# Altium PCB ETL_RB_Mockup.PcbDoc
Units mm, origin at the board's own origin, x right, y up, seen from the top; angles counter-clockwise.
Board outline 304.7 x 56.5 mm, 2 copper layers (Top Layer, Bottom Layer), stack 0.761 mm thick; 28 components, 0 nets, 1176 pads, 57 vias.
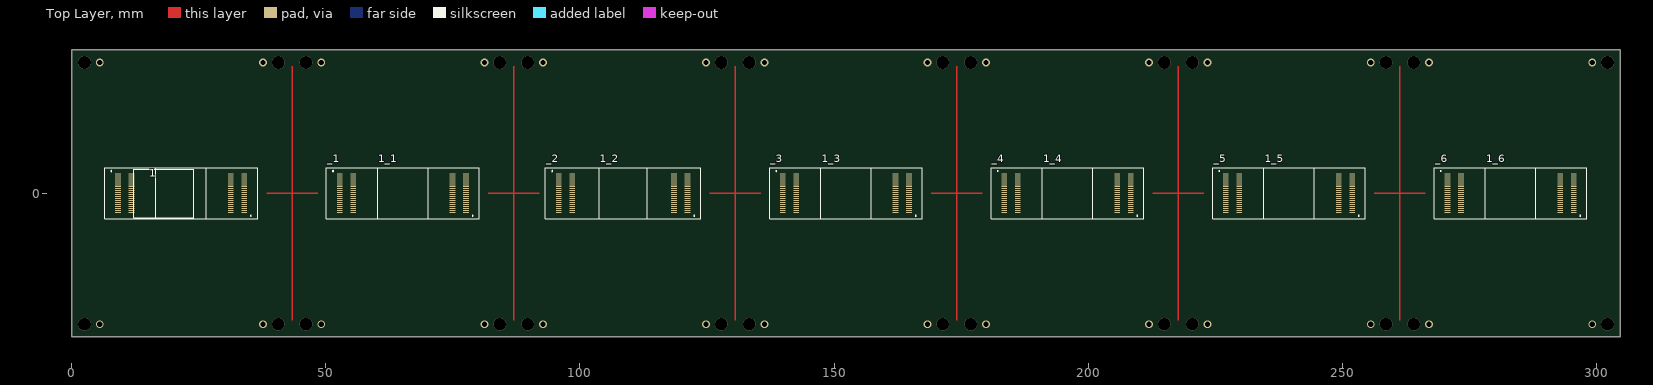
[diagram p0: Top Layer view]
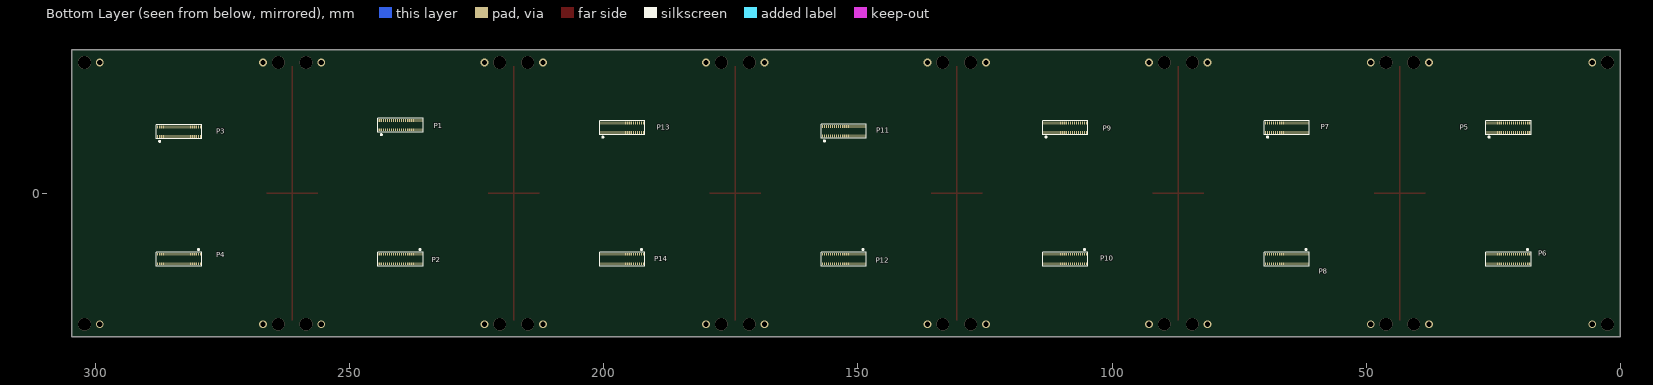
[diagram p1: Bottom Layer view, seen from below]

## Layer stack, top to bottom
Top Solder: solder mask 0.0178, Solder Resist, Dk 4.1
Top Layer: signal copper 0.0175
Dielectric 1: prepreg 0.0691, 1080, Dk 3.4
Dielectric 2: core 0.1016, TU-863, Dk 3.7
Dielectric 3: prepreg 0.1417, 1080, Dk 3.4
Dielectric 4: core 0.1016, TU-863, Dk 3.7
Dielectric 5: prepreg 0.1417, 1080, Dk 3.4
Dielectric 6: core 0.1016, TU-863, Dk 3.7
Dielectric 7: prepreg 0.0691, 1080, Dk 3.4
Bottom Layer: signal copper 0.0175
Bottom Solder: solder mask 0.0178, Solder Resist, Dk 4.1

## Board outline
0,-28.25 0,28.25 81.95,28.25 304.7,28.25 304.7,-28.25 91.95,-28.25 48.35,-28.25 38.35,-28.25

## Design rules (kind name [scope] priority, off if disabled: settings)
Clearance [All] p1: gap=0.076 ignorepadtopadclearanceinfootprint=FALSE except(0: Arc-Hole Track-Hole SMDPad-Hole THPad-Hole Via-Hole Fill-Hole Poly-Hole Region-Hole Text-Hole)
Height [All] p1 off: minheight=0 maxheight=25.4 prefheight=12.7
HoleToHoleClearance HoleToHoleClearance_1 [InNet('GND') or InNet('LV_RB') or InNet('1V5A') or InNet('1V5D') or InNet('1V2A') or InNet('1V2B') or InNet('1V2C') or InNet('1V2D') vs InNet('GND') or InNet('LV_RB') or InNet('1V5A') or InNet('1V5D') or InNet('1V2A') or InNet('1V2B') or InNet('1V2C') or InNet('1V2D')] p1: gap=0.15 allowstackedmicrovias=TRUE
HoleToHoleClearance [All] p2: gap=0.254 allowstackedmicrovias=TRUE
MinimumSolderMaskSliver [All] p1: minsoldermaskwidth=0.102
PlaneClearance PlaneClearance_1 [InNetClass('BV')] p1: clearance=0.508
PlaneClearance [All] p2: clearance=0.152
PlaneConnect PlaneConnect_1 [All] p1: planeconnectstyle=Direct reliefexpansion=0.508 reliefentries=4 reliefconductorwidth=0.254 reliefairgap=0.254
PolygonConnect [All] p1: connectstyle=Relief reliefconductorwidth=0.254 reliefentries=4 polygonreliefangle="90 Angle" airgapwidth=0.254
RoutingVias [All] p1: holewidth=0.25 width=0.4 viastyle="Through Hole" minholewidth=0.15 minwidth=0.25 maxholewidth=0.711 maxwidth=1.27
SilkToSilkClearance [All] p1: silktosilkclearance=0.025
SilkToSolderMaskClearance [IsPad] p1: minsilkscreentomaskgap=0.025 clearancetoexposedcopper=TRUE
SolderMaskExpansion SolderMaskExpansion_1 [InPadClass('WP7B40PAD')] p1: expansion=0.038 istentingtop=FALSE
SolderMaskExpansion [All] p2: expansion=0.051 istentingtop=FALSE
Width Width_HS [InNetClass('HS')] p1: maxlimit=0.13 minlimit=0.076 preferedwidth=0.12 bottomlayer_minwidth=0.12 bottomlayer_maxwidth=0.12 minimp=50.000000 maximp=50.000000 favimp=50.000000 // impedance controlled signals
Width [All] p2: maxlimit=2.54 minlimit=0.076 preferedwidth=0.12 toplayer_minwidth=0.076 minimp=50.000000 maximp=50.000000 favimp=50.000000
23 further rules are at their usual default settings.

## Classes and differential pairs
pad class WP7B40PAD: P5-1 P5-2 P5-3 P5-4 P5-5 P5-6 P5-7 P5-8 P5-9 P5-10 P5-11 P5-12 P5-13 P5-14 P5-15 P5-16 P5-17 P5-18 P5-19 P5-20 P5-21 P5-22 P5-23 P5-24 P5-25 P5-26 P5-27 P5-28 P5-29 P5-30 P5-31 P5-32 P5-33 P5-34 P5-35 P5-36 P5-37 P5-38 P5-39 P5-40 P5-41 P5-42 P5-43 P5-44 P6-1 P6-2 P6-3 P6-4 P6-5 P6-6 P6-7 P6-8 P6-9 P6-10 P6-11 P6-12 P6-13 P6-14 P6-15 P6-16 P6-17 P6-18 P6-19 P6-20 P6-21 P6-22 P6-23 P6-24 P6-25 P6-26 P6-27 P6-28 P6-29 P6-30 P6-31 P6-32 P6-33 P6-34 P6-35 P6-36 P6-37 P6-38 P6-39 P6-40 P6-41 P6-42 P6-43 P6-44 P7-1 P7-2 P7-3 P7-4 P7-5 P7-6 P7-7 P7-8 P7-9 P7-10 P7-11 P7-12 P7-13 P7-14 P7-15 P7-16 P7-17 P7-18 P7-19 P7-20 P7-21 P7-22 P7-23 P7-24 P7-25 P7-26 P7-27 P7-28 P7-29 P7-30 P7-31 P7-32 P7-33 P7-34 P7-35 P7-36 P7-37 P7-38 P7-39 P7-40 P7-41 P7-42 P7-43 P7-44 P8-1 P8-2 P8-3 P8-4 P8-5 P8-6 P8-7 P8-8 P8-9 P8-10 P8-11 P8-12 P8-13 P8-14 P8-15 P8-16 P8-17 P8-18 P8-19 P8-20 P8-21 P8-22 P8-23 P8-24 P8-25 P8-26 P8-27 P8-28 P8-29 P8-30 P8-31 P8-32 P8-33 P8-34 P8-35 P8-36 P8-37 P8-38 P8-39 P8-40 P8-41 P8-42 P8-43 P8-44 P9-1 P9-2 P9-3 P9-4 P9-5 P9-6 P9-7 P9-8 P9-9 P9-10 P9-11 P9-12 P9-13 P9-14 P9-15 P9-16 P9-17 P9-18 P9-19 P9-20 P9-21 P9-22 P9-23 P9-24 P9-25 P9-26 P9-27 P9-28 P9-29 P9-30 P9-31 P9-32 P9-33 P9-34 P9-35 P9-36 P9-37 P9-38 P9-39 P9-40 P9-41 P9-42 P9-43 P9-44 P10-1 P10-2 P10-3 P10-4 P10-5 P10-6 P10-7 P10-8 P10-9 P10-10 P10-11 P10-12 P10-13 P10-14 P10-15 P10-16 P10-17 P10-18 P10-19 P10-20 P10-21 P10-22 P10-23 P10-24 P10-25 P10-26 P10-27 P10-28 P10-29 P10-30 P10-31 P10-32 P10-33 P10-34 P10-35 P10-36 P10-37 P10-38 P10-39 P10-40 P10-41 P10-42 P10-43 P10-44
component class ETL_RB: P5 P6 P7 P8 P9 P10

## Components (designator, comment, footprint, x,y, rotation, side; value= is the part's Value field where it differs from the comment)
1 "DF40C-40DS-0.4V" vtrx+ 33.96,-3.8 r90 top
1_1 "DF40C-40DS-0.4V" vtrx+ 77.56,-3.8 r90 top
1_2 "DF40C-40DS-0.4V" vtrx+ 121.16,-3.8 r90 top
1_3 "DF40C-40DS-0.4V" vtrx+ 164.76,-3.8 r90 top
1_4 "DF40C-40DS-0.4V" vtrx+ 208.36,-3.8 r90 top
1_5 "DF40C-40DS-0.4V" vtrx+ 251.96,-3.8 r90 top
1_6 "DF40C-40DS-0.4V" vtrx+ 295.56,-3.8 r90 top
_1 "DF40C-40DS-0.4V" vtrx+ 52.7,3.8 r270 top
_2 "DF40C-40DS-0.4V" vtrx+ 95.8,3.8 r270 top
_3 "DF40C-40DS-0.4V" vtrx+ 139.9,3.8 r270 top
_4 "DF40C-40DS-0.4V" vtrx+ 183.5,3.8 r270 top
_5 "DF40C-40DS-0.4V" vtrx+ 227.1,3.8 r270 top
_6 "DF40C-40DS-0.4V" vtrx+ 270.7,3.8 r270 top
P1 "WP7B-P040VA1" wp7b-40p 243.8,12.5 r180 bottom
P2 "WP7B-P040VA1" wp7b-40p 236.2,-12 r0 bottom
P3 "WP7B-P040VA1" wp7b-40p 287.4,11.2 r180 bottom
P4 "WP7B-P040VA1" wp7b-40p 279.8,-12 r0 bottom
P5 "WP7B-P040VA1" WP7B-40P 25.8,12 r180 bottom locked
P6 "WP7B-P040VA1" WP7B-40P 18.2,-12 r0 bottom locked
P7 "WP7B-P040VA1" WP7B-40P 69.4,12 r180 bottom locked
P8 "WP7B-P040VA1" WP7B-40P 61.8,-12 r0 bottom locked
P9 "WP7B-P040VA1" WP7B-40P 113,12 r180 bottom locked
P10 "WP7B-P040VA1" WP7B-40P 105.4,-12 r0 bottom locked
P11 "WP7B-P040VA1" wp7b-40p 156.6,11.285 r180 bottom
P12 "WP7B-P040VA1" wp7b-40p 149,-12 r0 bottom
P13 "WP7B-P040VA1" wp7b-40p 200.2,12 r180 bottom
P14 "WP7B-P040VA1" wp7b-40p 192.6,-12 r0 bottom
? "DF40C-40DS-0.4V" vtrx+ 9.1,3.8 r270 top

## Footprints (in the part's own frame and the unit in brackets; to place one, negate y for a bottom-side part, rotate by r counter-clockwise, add the part's x,y. Pads: shape width x height; smd on the part's side, far side on the other; paste and mask are expansions set on the pad)
vtrx+ [mm]
  rect 0.2x1.12 smd: 1(0,0) 2(0,2.66) 3(0.4,0) 4(0.4,2.66) 5(0.8,0) 6(0.8,2.66) 7(1.2,0) 8(1.2,2.66) 9(1.6,0) 10(1.6,2.66) 11(2,0) 12(2,2.66) 13(2.4,0) 14(2.4,2.66) 15(2.8,0) 16(2.8,2.66) 17(3.2,0) 18(3.2,2.66) 19(3.6,0) 20(3.6,2.66) 21(4,0) 22(4,2.66) 23(4.4,0) 24(4.4,2.66) 25(4.8,0) 26(4.8,2.66) 27(5.2,0) 28(5.2,2.66) 29(5.6,0) 30(5.6,2.66) 31(6,0) 32(6,2.66) 33(6.4,0) 34(6.4,2.66) 35(6.8,0) 36(6.8,2.66) 37(7.2,0) 38(7.2,2.66) 39(7.6,0) 40(7.6,2.66)
  silkscreen extent -1.2,-2.6 8.8,17.4, body extent -1.2,-2.6 8.8,17.4, height 2
wp7b-40p [mm]
  rect 0.22x0.55 smd: 1(0,0) 2(0.4,0) 3(0.8,0) 4(1.2,0) 5(1.6,0) 6(2,0) 7(2.4,0) 8(2.8,0) 9(3.2,0) 10(3.6,0) 11(4,0) 12(4.4,0) 13(4.8,0) 14(5.2,0) 15(5.6,0) 16(6,0) 17(6.4,0) 18(6.8,0) 19(7.2,0) 20(7.6,0) 21(7.6,1.85) 22(7.2,1.85) 23(6.8,1.85) 24(6.4,1.85) 25(6,1.85) 26(5.6,1.85) 27(5.2,1.85) 28(4.8,1.85) 29(4.4,1.85) 30(4,1.85) 31(3.6,1.85) 32(3.2,1.85) 33(2.8,1.85) 34(2.4,1.85) 35(2,1.85) 36(1.6,1.85) 37(1.2,1.85) 38(0.8,1.85) 39(0.4,1.85) 40(0,1.85) 41(-0.4,0) 42(8,0) 43(8,1.85) 44(-0.4,1.85)
  silkscreen extent -0.65,-1 8.25,2.3, body extent -1.5,-0.32 9.1,2.17, height 0.5
WP7B-40P [mm]
  rect 0.22x0.55 smd: 1(0,0) 2(0.4,0) 3(0.8,0) 4(1.2,0) 5(1.6,0) 6(2,0) 7(2.4,0) 8(2.8,0) 9(3.2,0) 10(3.6,0) 11(4,0) 12(4.4,0) 13(4.8,0) 14(5.2,0) 15(5.6,0) 16(6,0) 17(6.4,0) 18(6.8,0) 19(7.2,0) 20(7.6,0) 21(7.6,1.85) 22(7.2,1.85) 23(6.8,1.85) 24(6.4,1.85) 25(6,1.85) 26(5.6,1.85) 27(5.2,1.85) 28(4.8,1.85) 29(4.4,1.85) 30(4,1.85) 31(3.6,1.85) 32(3.2,1.85) 33(2.8,1.85) 34(2.4,1.85) 35(2,1.85) 36(1.6,1.85) 37(1.2,1.85) 38(0.8,1.85) 39(0.4,1.85) 40(0,1.85) 41(-0.4,0) 42(8,0) 43(8,1.85) 44(-0.4,1.85)
  silkscreen extent -0.65,-1 8.25,2.3, body extent -1.5,-0.32 9.1,2.17, height 0.5

## Part data
1 1_1 1_2 1_3 1_4 1_5 1_6 _1 _2 _3 _4 _5 _6 ?: library part VTRX+_DF40C-2.0-40DS-0.4V, "VTRX+ module with 2.5mm stack Height.", Parameter 1=VTRX+
P1 P2 P3 P4 P5 P6 P7 P8 P9 P10 P11 P12 P13 P14: library part WP7B-40P, "plug"

## Via types
v1: diameter 1.524, hole 1.016, Top Layer to Bottom Layer, 29 vias
v2: diameter 2.5, hole 2.5, Top Layer to Bottom Layer, 28 vias

## Nets (pads, with @x,y where several pads share a name; then routed paths per layer and width w, separated by ;. In a path a pad name is that pad's centre, name@x,y a point inside that pad or via, vN(x,y) a via of type N, cw(c..) or ccw(c..) an arc to the next point about the centre after c; other vN are vias at no path point)
pads on no net: 1.1 1.2 1.3 1.4 1.5 1.6 1.7 1.8 1.9 1.10 1.11 1.12 1.13 1.14 1.15 1.16 1.17 1.18 1.19 1.20 1.21 1.22 1.23 1.24 1.25 1.26 1.27 1.28 1.29 1.30 1.31 1.32 1.33 1.34 1.35 1.36 1.37 1.38 1.39 1.40 1_1.1 1_1.2 1_1.3 1_1.4 1_1.5 1_1.6 1_1.7 1_1.8 1_1.9 1_1.10 1_1.11 1_1.12 1_1.13 1_1.14 1_1.15 1_1.16 1_1.17 1_1.18 1_1.19 1_1.20 1_1.21 1_1.22 1_1.23 1_1.24 1_1.25 1_1.26 1_1.27 1_1.28 1_1.29 1_1.30 1_1.31 1_1.32 1_1.33 1_1.34 1_1.35 1_1.36 1_1.37 1_1.38 1_1.39 1_1.40 1_2.1 1_2.2 1_2.3 1_2.4 1_2.5 1_2.6 1_2.7 1_2.8 1_2.9 1_2.10 1_2.11 1_2.12 1_2.13 1_2.14 1_2.15 1_2.16 1_2.17 1_2.18 1_2.19 1_2.20 1_2.21 1_2.22 1_2.23 1_2.24 1_2.25 1_2.26 1_2.27 1_2.28 1_2.29 1_2.30 1_2.31 1_2.32 1_2.33 1_2.34 1_2.35 1_2.36 1_2.37 1_2.38 1_2.39 1_2.40 1_3.1 1_3.2 1_3.3 1_3.4 1_3.5 1_3.6 1_3.7 1_3.8 1_3.9 1_3.10 1_3.11 1_3.12 1_3.13 1_3.14 1_3.15 1_3.16 1_3.17 1_3.18 1_3.19 1_3.20 1_3.21 1_3.22 1_3.23 1_3.24 1_3.25 1_3.26 1_3.27 1_3.28 1_3.29 1_3.30 1_3.31 1_3.32 1_3.33 1_3.34 1_3.35 1_3.36 1_3.37 1_3.38 1_3.39 1_3.40 1_4.1 1_4.2 1_4.3 1_4.4 1_4.5 1_4.6 1_4.7 1_4.8 1_4.9 1_4.10 1_4.11 1_4.12 1_4.13 1_4.14 1_4.15 1_4.16 1_4.17 1_4.18 1_4.19 1_4.20 1_4.21 1_4.22 1_4.23 1_4.24 1_4.25 1_4.26 1_4.27 1_4.28 1_4.29 1_4.30 1_4.31 1_4.32 1_4.33 1_4.34 1_4.35 1_4.36 1_4.37 1_4.38 1_4.39 1_4.40 1_5.1 1_5.2 1_5.3 1_5.4 1_5.5 1_5.6 1_5.7 1_5.8 1_5.9 1_5.10 1_5.11 1_5.12 1_5.13 1_5.14 1_5.15 1_5.16 1_5.17 1_5.18 1_5.19 1_5.20 1_5.21 1_5.22 1_5.23 1_5.24 1_5.25 1_5.26 1_5.27 1_5.28 1_5.29 1_5.30 1_5.31 1_5.32 1_5.33 1_5.34 1_5.35 1_5.36 1_5.37 1_5.38 1_5.39 1_5.40 1_6.1 1_6.2 1_6.3 1_6.4 1_6.5 1_6.6 1_6.7 1_6.8 1_6.9 1_6.10 1_6.11 1_6.12 1_6.13 1_6.14 1_6.15 1_6.16 1_6.17 1_6.18 1_6.19 1_6.20 1_6.21 1_6.22 1_6.23 1_6.24 1_6.25 1_6.26 1_6.27 1_6.28 1_6.29 1_6.30 1_6.31 1_6.32 1_6.33 1_6.34 1_6.35 1_6.36 1_6.37 1_6.38 1_6.39 1_6.40 ?.1 ?.2 ?.3 ?.4 ?.5 ?.6 ?.7 ?.8 ?.9 ?.10 ?.11 ?.12 ?.13 ?.14 ?.15 ?.16 ?.17 ?.18 ?.19 ?.20 ?.21 ?.22 ?.23 ?.24 ?.25 ?.26 ?.27 ?.28 ?.29 ?.30 ?.31 ?.32 ?.33 ?.34 ?.35 ?.36 ?.37 ?.38 ?.39 ?.40 _1.1 _1.2 _1.3 _1.4 _1.5 _1.6 _1.7 _1.8 _1.9 _1.10 _1.11 _1.12 _1.13 _1.14 _1.15 _1.16 _1.17 _1.18 _1.19 _1.20 _1.21 _1.22 _1.23 _1.24 _1.25 _1.26 _1.27 _1.28 _1.29 _1.30 _1.31 _1.32 _1.33 _1.34 _1.35 _1.36 _1.37 _1.38 _1.39 _1.40 _2.1 _2.2 _2.3 _2.4 _2.5 _2.6 _2.7 _2.8 _2.9 _2.10 _2.11 _2.12 _2.13 _2.14 _2.15 _2.16 _2.17 _2.18 _2.19 _2.20 _2.21 _2.22 _2.23 _2.24 _2.25 _2.26 _2.27 _2.28 _2.29 _2.30 _2.31 _2.32 _2.33 _2.34 _2.35 _2.36 _2.37 _2.38 _2.39 _2.40 _3.1 _3.2 _3.3 _3.4 _3.5 _3.6 _3.7 _3.8 _3.9 _3.10 _3.11 _3.12 _3.13 _3.14 _3.15 _3.16 _3.17 _3.18 _3.19 _3.20 _3.21 _3.22 _3.23 _3.24 _3.25 _3.26 _3.27 _3.28 _3.29 _3.30 _3.31 _3.32 _3.33 _3.34 _3.35 _3.36 _3.37 _3.38 _3.39 _3.40 _4.1 _4.2 _4.3 _4.4 _4.5 _4.6 _4.7 _4.8 _4.9 _4.10 _4.11 _4.12 _4.13 _4.14 _4.15 _4.16 _4.17 _4.18 _4.19 _4.20 _4.21 _4.22 _4.23 _4.24 _4.25 _4.26 _4.27 _4.28 _4.29 _4.30 _4.31 _4.32 _4.33 _4.34 _4.35 _4.36 _4.37 _4.38 _4.39 _4.40 _5.1 _5.2 _5.3 _5.4 _5.5 _5.6 _5.7 _5.8 _5.9 _5.10 _5.11 _5.12 _5.13 _5.14 _5.15 _5.16 _5.17 _5.18 _5.19 _5.20 _5.21 _5.22 _5.23 _5.24 _5.25 _5.26 _5.27 _5.28 _5.29 _5.30 _5.31 _5.32 _5.33 _5.34 _5.35 _5.36 _5.37 _5.38 _5.39 _5.40 _6.1 _6.2 _6.3 _6.4 _6.5 _6.6 _6.7 _6.8 _6.9 _6.10 _6.11 _6.12 _6.13 _6.14 _6.15 _6.16 _6.17 _6.18 _6.19 _6.20 _6.21 _6.22 _6.23 _6.24 _6.25 _6.26 _6.27 _6.28 _6.29 _6.30 _6.31 _6.32 _6.33 _6.34 _6.35 _6.36 _6.37 _6.38 _6.39 _6.40 P1.1 P1.2 P1.3 P1.4 P1.5 P1.6 P1.7 P1.8 P1.9 P1.10 P1.11 P1.12 P1.13 P1.14 P1.15 P1.16 P1.17 P1.18 P1.19 P1.20 P1.21 P1.22 P1.23 P1.24 P1.25 P1.26 P1.27 P1.28 P1.29 P1.30 P1.31 P1.32 P1.33 P1.34 P1.35 P1.36 P1.37 P1.38 P1.39 P1.40 P1.41 P1.42 P1.43 P1.44 P2.1 P2.2 P2.3 P2.4 P2.5 P2.6 P2.7 P2.8 P2.9 P2.10 P2.11 P2.12 P2.13 P2.14 P2.15 P2.16 P2.17 P2.18 P2.19 P2.20 P2.21 P2.22 P2.23 P2.24 P2.25 P2.26 P2.27 P2.28 P2.29 P2.30 P2.31 P2.32 P2.33 P2.34 P2.35 P2.36 P2.37 P2.38 P2.39 P2.40 P2.41 P2.42 P2.43 P2.44 P3.1 P3.2 P3.3 P3.4 P3.5 P3.6 P3.7 P3.8 P3.9 P3.10 P3.11 P3.12 P3.13 P3.14 P3.15 P3.16 P3.17 P3.18 P3.19 P3.20 P3.21 P3.22 P3.23 P3.24 P3.25 P3.26 P3.27 P3.28 P3.29 P3.30 P3.31 P3.32 P3.33 P3.34 P3.35 P3.36 P3.37 P3.38 P3.39 P3.40 P3.41 P3.42 P3.43 P3.44 P4.1 P4.2 P4.3 P4.4 P4.5 P4.6 P4.7 P4.8 P4.9 P4.10 P4.11 P4.12 P4.13 P4.14 P4.15 P4.16 P4.17 P4.18 P4.19 P4.20 P4.21 P4.22 P4.23 P4.24 P4.25 P4.26 P4.27 P4.28 P4.29 P4.30 P4.31 P4.32 P4.33 P4.34 P4.35 P4.36 P4.37 P4.38 P4.39 P4.40 P4.41 P4.42 P4.43 P4.44 P5.1 P5.2 P5.3 P5.4 P5.5 P5.6 P5.7 P5.8 P5.9 P5.10 P5.11 P5.12 P5.13 P5.14 P5.15 P5.16 P5.17 P5.18 P5.19 P5.20 P5.21 P5.22 P5.23 P5.24 P5.25 P5.26 P5.27 P5.28 P5.29 P5.30 P5.31 P5.32 P5.33 P5.34 P5.35 P5.36 P5.37 P5.38 P5.39 P5.40 P5.41 P5.42 P5.43 P5.44 P6.1 P6.2 P6.3 P6.4 P6.5 P6.6 P6.7 P6.8 P6.9 P6.10 P6.11 P6.12 P6.13 P6.14 P6.15 P6.16 P6.17 P6.18 P6.19 P6.20 P6.21 P6.22 P6.23 P6.24 P6.25 P6.26 P6.27 P6.28 P6.29 P6.30 P6.31 P6.32 P6.33 P6.34 P6.35 P6.36 P6.37 P6.38 P6.39 P6.40 P6.41 P6.42 P6.43 P6.44 P7.1 P7.2 P7.3 P7.4 P7.5 P7.6 P7.7 P7.8 P7.9 P7.10 P7.11 P7.12 P7.13 P7.14 P7.15 P7.16 P7.17 P7.18 P7.19 P7.20 P7.21 P7.22 P7.23 P7.24 P7.25 P7.26 P7.27 P7.28 P7.29 P7.30 P7.31 P7.32 P7.33 P7.34 P7.35 P7.36 P7.37 P7.38 P7.39 P7.40 P7.41 P7.42 P7.43 P7.44 P8.1 P8.2 P8.3 P8.4 P8.5 P8.6 P8.7 P8.8 P8.9 P8.10 P8.11 P8.12 P8.13 P8.14 P8.15 P8.16 P8.17 P8.18 P8.19 P8.20 P8.21 P8.22 P8.23 P8.24 P8.25 P8.26 P8.27 P8.28 P8.29 P8.30 P8.31 P8.32 P8.33 P8.34 P8.35 P8.36 P8.37 P8.38 P8.39 P8.40 P8.41 P8.42 P8.43 P8.44 P9.1 P9.2 P9.3 P9.4 P9.5 P9.6 P9.7 P9.8 P9.9 P9.10 P9.11 P9.12 P9.13 P9.14 P9.15 P9.16 P9.17 P9.18 P9.19 P9.20 P9.21 P9.22 P9.23 P9.24 P9.25 P9.26 P9.27 P9.28 P9.29 P9.30 P9.31 P9.32 P9.33 P9.34 P9.35 P9.36 P9.37 P9.38 P9.39 P9.40 P9.41 P9.42 P9.43 P9.44 P10.1 P10.2 P10.3 P10.4 P10.5 P10.6 P10.7 P10.8 P10.9 P10.10 P10.11 P10.12 P10.13 P10.14 P10.15 P10.16 P10.17 P10.18 P10.19 P10.20 P10.21 P10.22 P10.23 P10.24 P10.25 P10.26 P10.27 P10.28 P10.29 P10.30 P10.31 P10.32 P10.33 P10.34 P10.35 P10.36 P10.37 P10.38 P10.39 P10.40 P10.41 P10.42 P10.43 P10.44 P11.1 P11.2 P11.3 P11.4 P11.5 P11.6 P11.7 P11.8 P11.9 P11.10 P11.11 P11.12 P11.13 P11.14 P11.15 P11.16 P11.17 P11.18 P11.19 P11.20 P11.21 P11.22 P11.23 P11.24 P11.25 P11.26 P11.27 P11.28 P11.29 P11.30 P11.31 P11.32 P11.33 P11.34 P11.35 P11.36 P11.37 P11.38 P11.39 P11.40 P11.41 P11.42 P11.43 P11.44 P12.1 P12.2 P12.3 P12.4 P12.5 P12.6 P12.7 P12.8 P12.9 P12.10 P12.11 P12.12 P12.13 P12.14 P12.15 P12.16 P12.17 P12.18 P12.19 P12.20 P12.21 P12.22 P12.23 P12.24 P12.25 P12.26 P12.27 P12.28 P12.29 P12.30 P12.31 P12.32 P12.33 P12.34 P12.35 P12.36 P12.37 P12.38 P12.39 P12.40 P12.41 P12.42 P12.43 P12.44 P13.1 P13.2 P13.3 P13.4 P13.5 P13.6 P13.7 P13.8 P13.9 P13.10 P13.11 P13.12 P13.13 P13.14 P13.15 P13.16 P13.17 P13.18 P13.19 P13.20 P13.21 P13.22 P13.23 P13.24 P13.25 P13.26 P13.27 P13.28 P13.29 P13.30 P13.31 P13.32 P13.33 P13.34 P13.35 P13.36 P13.37 P13.38 P13.39 P13.40 P13.41 P13.42 P13.43 P13.44 P14.1 P14.2 P14.3 P14.4 P14.5 P14.6 P14.7 P14.8 P14.9 P14.10 P14.11 P14.12 P14.13 P14.14 P14.15 P14.16 P14.17 P14.18 P14.19 P14.20 P14.21 P14.22 P14.23 P14.24 P14.25 P14.26 P14.27 P14.28 P14.29 P14.30 P14.31 P14.32 P14.33 P14.34 P14.35 P14.36 P14.37 P14.38 P14.39 P14.40 P14.41 P14.42 P14.43 P14.44
copper on no net: | length 360
  Top Layer w0.254: 38.35,0 48.35,0 ; 43.35,-25 43.35,25 ; 81.95,0 91.95,0 ; 86.95,-25 86.95,25 ; 125.55,0 135.55,0 ; 130.55,-25 130.55,25 ; 169.15,0 179.15,0 ; 174.15,-25 174.15,25 ; 212.75,0 222.75,0 ; 217.75,-25 217.75,25 ; 256.35,0 266.35,0 ; 261.35,-25 261.35,25
  other v1: 5.5,-25.75 37.6,-25.75 49.1,-25.75 81.2,-25.75 92.7,-25.75 124.8,-25.75 136.3,-25.75 168.4,-25.75 179.9,-25.75 212,-25.75 223.5,-25.75 255.6,-25.75 267.1,-25.75 299.2,-25.75 5.5,25.75 37.6,25.75 49.1,25.75 81.2,25.75 92.7,25.75 124.8,25.75 136.3,25.75 168.4,25.75 179.9,25.75 212,25.75 223.5,25.75 255.6,25.75 258.1,25.75 267.1,25.75 299.2,25.75
  other v2: 2.5,-25.75 40.6,-25.75 46.1,-25.75 84.2,-25.75 89.7,-25.75 127.8,-25.75 133.3,-25.75 171.4,-25.75 176.9,-25.75 215,-25.75 220.5,-25.75 258.6,-25.75 264.1,-25.75 302.2,-25.75 2.5,25.75 40.6,25.75 46.1,25.75 84.2,25.75 89.7,25.75 127.8,25.75 133.3,25.75 171.4,25.75 176.9,25.75 215,25.75 220.5,25.75 258.6,25.75 264.1,25.75 302.2,25.75

## Silkscreen, mask and mechanical layers (free items; w line width, h text height)
Top Overlay:
  lines w0.102: 12.15,-4.75 24,-4.75 24,4.75 12.15,4.75 12.15,-4.75
Mechanical 14:
  lines w0.15: 0,-28.25 304.701,-28.25 304.701,28.25 0,28.25 0,-28.25 ; 13.45,-4 ccw(c14.45,-4) 14.45,-5 28.65,-5 ccw(c28.65,-4) 29.65,-4 29.65,4 ccw(c28.65,4) 28.65,5 14.45,5 ccw(c14.45,4) 13.45,4 13.45,-4 ; 57.05,-4 ccw(c58.05,-4) 58.05,-5 72.25,-5 ccw(c72.25,-4) 73.25,-4 73.25,4 ccw(c72.25,4) 72.25,5 58.05,5 ccw(c58.05,4) 57.05,4 57.05,-4 ; 100.65,-4 ccw(c101.65,-4) 101.65,-5 115.85,-5 ccw(c115.85,-4) 116.85,-4 116.85,4 ccw(c115.85,4) 115.85,5 101.65,5 ccw(c101.65,4) 100.65,4 100.65,-4 ; 122.45,-21.25 ccw(c123.45,-21.25) 123.45,-22.25 137.65,-22.25 ccw(c137.65,-21.25) 138.65,-21.25 138.65,-13.25 ccw(c137.65,-13.25) 137.65,-12.25 123.45,-12.25 ccw(c123.45,-13.25) 122.45,-13.25 122.45,-21.25 ; 144.25,-4 ccw(c145.25,-4) 145.25,-5 159.45,-5 ccw(c159.45,-4) 160.45,-4 160.45,4 ccw(c159.45,4) 159.45,5 145.25,5 ccw(c145.25,4) 144.25,4 144.25,-4 ; 187.85,-4 ccw(c188.85,-4) 188.85,-5 203.05,-5 ccw(c203.05,-4) 204.05,-4 204.05,4 ccw(c203.05,4) 203.05,5 188.85,5 ccw(c188.85,4) 187.85,4 187.85,-4 ; 231.45,-4 ccw(c232.45,-4) 232.45,-5 246.65,-5 ccw(c246.65,-4) 247.65,-4 247.65,4 ccw(c246.65,4) 246.65,5 232.45,5 ccw(c232.45,4) 231.45,4 231.45,-4 ; 253.25,-21.25 ccw(c254.25,-21.25) 254.25,-22.25 268.45,-22.25 ccw(c268.45,-21.25) 269.45,-21.25 269.45,-13.25 ccw(c268.45,-13.25) 268.45,-12.25 254.25,-12.25 ccw(c254.25,-13.25) 253.25,-13.25 253.25,-21.25 ; 275.05,-4 ccw(c276.05,-4) 276.05,-5 290.25,-5 ccw(c290.25,-4) 291.25,-4 291.25,4 ccw(c290.25,4) 290.25,5 276.05,5 ccw(c276.05,4) 275.05,4 275.05,-4
  text "CUTOUT" at 17.522,-0.754 h1.5
  text "CUTOUT" at 61.055,-0.754 h1.5
  text "CUTOUT" at 104.589,-0.754 h1.5
  text "CUTOUT" at 148.122,-0.754 h1.5
  text "CUTOUT" at 191.655,-0.754 h1.5
  text "CUTOUT" at 235.189,-0.754 h1.5
  text "CUTOUT" at 278.722,-0.754 h1.5
  text "CUTOUT" at 126.489,-17.954 h1.5
  text "CUTOUT" at 257.389,-18.454 h1.5